# Altium PCB ArtFire.PcbDoc (part 2 of 2)
Units mil, origin at the board's own origin, x right, y up, seen from the top; angles counter-clockwise.
Board outline 4250 x 3350 mil, 2 copper layers (Top Layer, Bottom Layer); 232 components, 155 nets, 793 pads, 301 vias.
Unrouted connection lines stored in the file: 12.
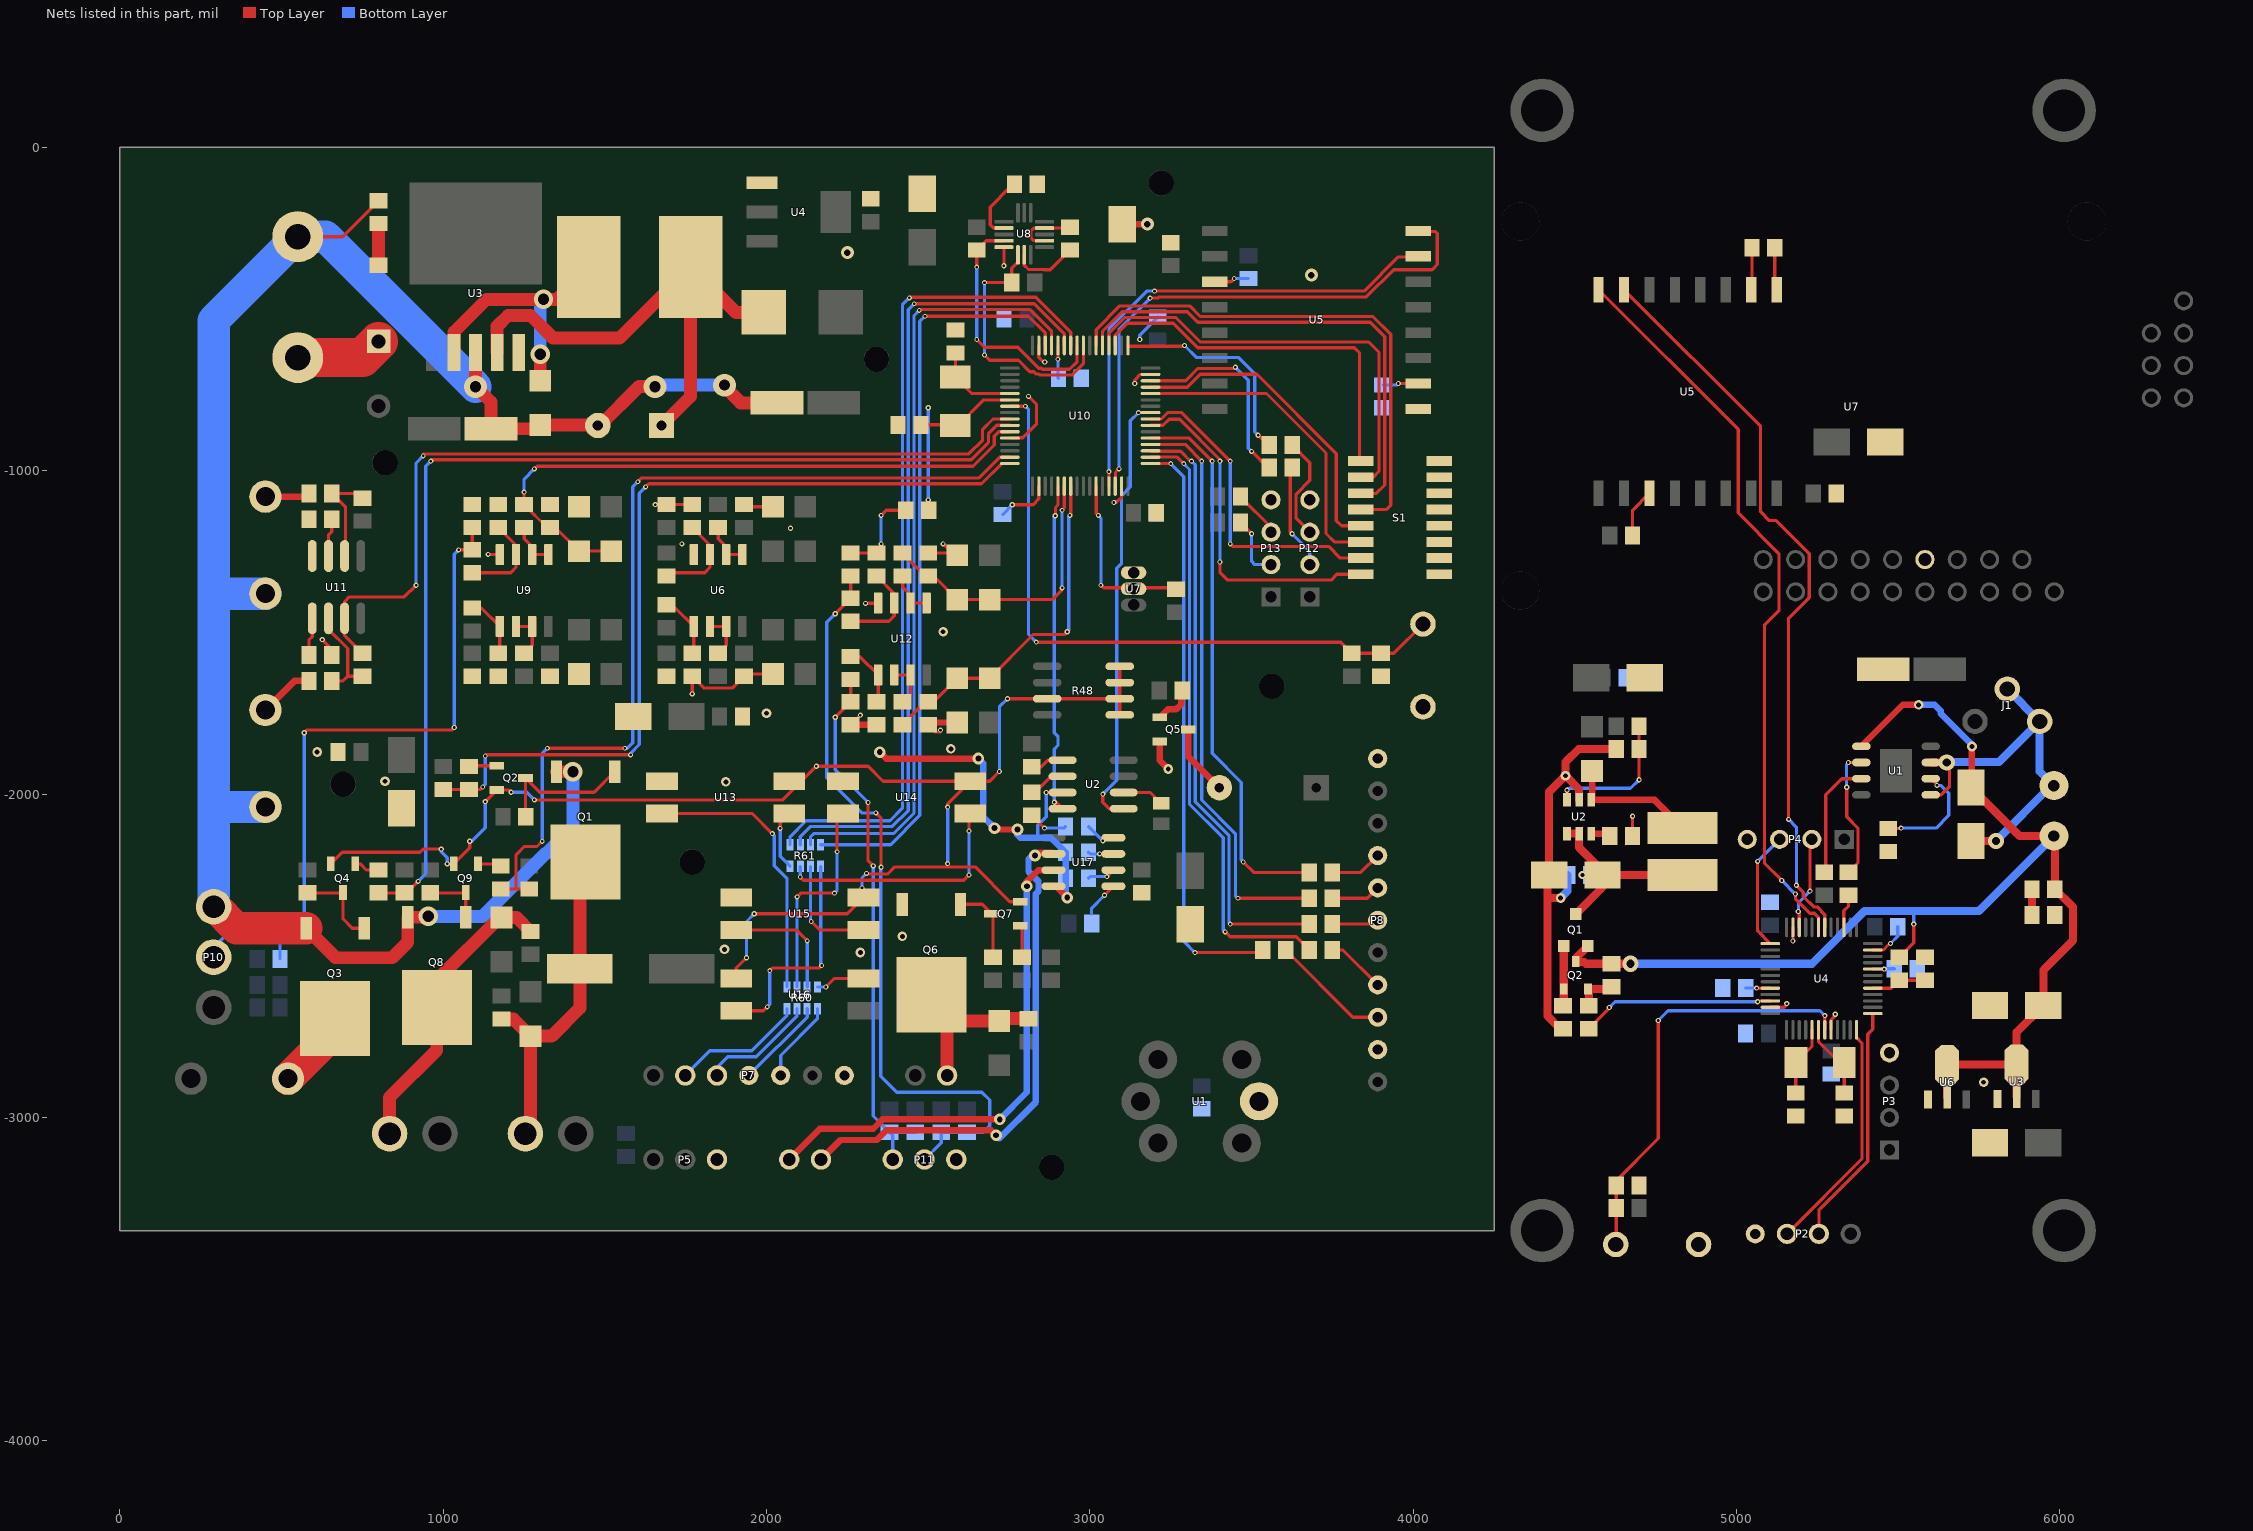
[diagram p2: the nets of this part, all layers, seen from the top]

## Via types
v1: diameter 16, hole 8, Top Layer to Bottom Layer, tented both sides, 170 vias
v2: diameter 15, hole 8, Top Layer to Bottom Layer, tented both sides, 76 vias
v3: diameter 30, hole 15, Top Layer to Bottom Layer, tented both sides, 17 vias
v4: diameter 36, hole 18, Top Layer to Bottom Layer, tented both sides, 10 vias
v5: diameter 60, hole 35, Top Layer to Bottom Layer, tented both sides, 7 vias
v6: diameter 40, hole 20, Top Layer to Bottom Layer, tented both sides, 6 vias
v7: diameter 19.68, hole 7.87, Top Layer to Bottom Layer, tented both sides, 6 vias
v8: diameter 50, hole 25, Top Layer to Bottom Layer, tented both sides, 5 vias
v9: diameter 70, hole 35, Top Layer to Bottom Layer, tented both sides, 3 vias
v10: diameter 24, hole 12, Top Layer to Bottom Layer, tented both sides, 1 vias

## Nets (pads, with @x,y where several pads share a name; then routed paths per layer and width w, separated by ;. In a path a pad name is that pad's centre, name@x,y a point inside that pad or via, vN(x,y) a via of type N, cw(c..) or ccw(c..) an arc to the next point about the centre after c; other vN are vias at no path point) (continued)
FIRE_TEM_T: R51.2 U10.9 U11.7 | length 2718.5
  Top Layer w10: R51.2@750,-1564.57 695,-1509.57 U11.7@695,-1456.46 695,-1405 710,-1390 880,-1390 v1(916,-1354) ; v2(938,-954) 938,-948 2625.46,-948 2668,-905.46 2668,-872 2700.16,-839.84 U10.9@2752.48,-839.84
  Bottom Layer w10: v1(916,-1354) 916,-976 v2(938,-954)
FIRE_UP: R11.1@880,-2305.43 R12.1@800,-2305.43 U10.10 | length 3305.4
  Top Layer w10: R12.1@800,-2305.43 R11.1@880,-2305.43 886.9,-2305.43 v2(922.33,-2270) ; v2(962,-970) 966,-966 2632.91,-966 2686,-912.91 2686,-886 2712.47,-859.53 U10.10@2752.48,-859.53
  Bottom Layer w10: v2(922.33,-2270) 946,-2246.33 946,-986 v2(962,-970)
FLD_IN: C23.2 D8.1 D10.2 R31.1 U10.11 | length 1987.2
  Top Layer w10: v2(1250,-1066) R31.1@1250,-1104.57 1320.87,-1175.43 C23.2@1330,-1175.43 1346.93,-1175.43 D10.2@1420,-1248.5 D8.1@1520,-1248.5 ; v2(1282,-994) 1290,-986 2638.37,-986 2704,-920.37 2704,-893.46 2718.24,-879.21 U10.11@2752.48,-879.21
  Bottom Layer w10: v2(1250,-1066) 1250,-1026 v2(1282,-994)
FLD_OUT: C18.1 C21.2 P10.2 R33.2 R34.1 | length 2221.5
  Top Layer w10: v1(570,-1810) 578,-1802 1026,-1802 v1(1034,-1794) ; v1(1047.43,-1244.57) R33.2@1090,-1244.57 C21.2@1090,-1175.43
  Bottom Layer w10: P10.2@290,-2504.09 290,-2474 394,-2370 466,-2370 495.43,-2399.43 C18.1@495.43,-2430 ; R34.1@495.43,-2510 C18.1@495.43,-2430 ; v1(570,-1810) 570,-2410 550,-2430 C18.1@495.43,-2430 ; v1(1034,-1794) 1034,-1258 v1(1047.43,-1244.57)
FP6291EN: R16.1@4542.83,-2725.43 U4.46 | length 598.5
  Top Layer w10: R16.1@4542.83,-2725.43 4605.83,-2662.43 v1(4605.83,-2660) ; v1(5064.83,-2642) 5067.34,-2639.5 U4.46@5104.28,-2639.5
  Bottom Layer w10: v1(4605.83,-2660) 4623.83,-2642 v1(5064.83,-2642)
GND: BT1.2 C1.2@5453.24,-1614 C2.2@5724.83,-2144.68 C3.2@4477.4,-2250 C4.2@4420.16,-2250 C5.2@4658.27,-1640 C6.2@4715.51,-1640 C7.2@5783.35,-2653.62 C8.2@5783.35,-3078.62 C9.2@5308.27,-1070 C10.2@5459.51,-911 C11.2@5027.4,-2740 C12.2@5498.27,-2410 C13.2@5292.83,-2865.43 C14.2@5102.84,-2334.57 C15.2@5182.84,-2995.43 C16.1@4698.27,-3210 C17.2@5332.84,-2995.43 D1.2@5984.27,-2374 J1.2 J1.3 P2.4 P3.4 P4.4 R4.2@5468.84,-2177.43 R6.2@4678.27,-2130 R8.2@4627.4,-1860 R10.2@5558.27,-2540 R11.2@5582.83,-2504.57 R14.2@4957.4,-2600 R15.2@5118.27,-310 R17.2@4462.84,-2725.43 S1.1@4882.2,-3392.8 U1.1@5600.31,-2002.2 U1.3@5600.31,-1902.2 U2.2@4512.83,-2017.84 U3.1@5806.97,-2942.99 U4.8 U4.23 U4.35 U4.47 U5.9@5124.02,-440.08 U6.1@5591.97,-2944.43 U7.2@5582.43,-1274.51 | length 2946.6
  Top Layer w10: R6.2@4678.27,-2130 v1(4678.27,-2068.57) ; U4.47@5104.28,-2659.18 5146.65,-2659.18 5154.83,-2651 v1(5154.83,-2648) ; U5.9@5118.27,-434.33 R15.2@5118.27,-310 ; v1(5174.17,-2454.33) U4.35@5174.17,-2412.13 ; U4.8@5292.28,-2729.06 5292.28,-2697.81 5304.83,-2685.25 v1(5304.83,-2681) ; U4.23@5421.21,-2482.02 5452.82,-2482.02 5472.83,-2462 v1(5475.83,-2462) ; U1.1@5600.31,-2002.2 5632.64,-2002.2 5658.75,-1976.08 v8@5658.75,-1900.31
  Top Layer w25: 4417.78,-2321 v3(4455.83,-2321) ; R17.2@4462.84,-2725.43 4453.53,-2725.43 4414.78,-2686.68 4414.78,-2255.38 C4.2@4420.16,-2250 4420.16,-1993.68 4467.83,-1946 4473.83,-1946 4512.83,-1985 U2.2@4512.83,-2017.84 ; v3(4470.83,-1943) 4470.83,-1901 4511.83,-1860 R8.2@4627.4,-1860 ; U1.3@5600.31,-1902.2 5656.87,-1902.2 v8@5658.75,-1900.31 ; C2.2@5724.83,-2144.68 v8(5802.16,-2144.68)
  Bottom Layer w10: v1(5475.83,-2462) 5498.27,-2439.57 C12.2@5498.27,-2410
  Bottom Layer w25: v3(4455.83,-2321) 4477.4,-2299.43 C3.2@4477.4,-2250 ; v8(5649.83,-1902.2) 5651.03,-1901 5811.44,-1901 J1.2@5937.24,-1775.2 ; v8(5802.16,-2144.68) 5973.21,-1973.62 BT1.2@5981.46,-1973.62 5937.24,-1929.4 J1.2@5937.24,-1775.2 ; J1.3@5837.24,-1675.2 J1.2@5937.24,-1775.2
  other v3: 5763.83,-2891
HIMRXD: P2.3 U4.12 | length 733.9
  Top Layer w10: P2.3@5155.98,-3360 5387.83,-3128.15 5387.83,-2770 5371.02,-2753.18 U4.12@5371.02,-2729.06
HIMTXD: P2.2@5254.41,-3360 U4.13 | length 750.2
  Top Layer w10: P2.2@5254.41,-3360 5254.41,-3287.03 5405.83,-3135.61 5405.83,-2742 5421.21,-2726.62 U4.13@5421.21,-2678.87
IO1: R61.1 U10.58 | length 2582.1
  Top Layer w10: v2(2441.5,-465.5) 2444,-463 2832.46,-463 2940.47,-571.02 U10.58@2940.47,-612.48
  Bottom Layer w10: R61.1@2072.76,-2156.54 2072.76,-2131.24 2122,-2082 2381.63,-2082 2420,-2043.63 2420,-487 v2(2441.5,-465.5)
IO2: R61.2 U10.59 | length 2505.8
  Top Layer w10: v2(2456.5,-483.5) 2827.5,-483.5 2920.79,-576.79 U10.59@2920.79,-612.48
  Bottom Layer w10: R61.2@2104.25,-2156.54 2104.25,-2131.75 2136,-2100 2389.09,-2100 2438,-2051.09 2438,-502 v2(2456.5,-483.5)
IO3: R61.3 U10.61 | length 2418.7
  Top Layer w10: v2(2472,-504) 2474.5,-501.5 2814.96,-501.5 2881.42,-567.96 U10.61@2881.42,-612.48
  Bottom Layer w10: R61.3@2135.75,-2156.54 2135.75,-2132.25 2146,-2122 2392.54,-2122 2456,-2058.54 2456,-520 v2(2472,-504)
IO4: R61.4 U10.62 | length 2326.8
  Top Layer w10: v2(2490,-522) 2810,-522 2861.73,-573.73 U10.62@2861.73,-612.48
  Bottom Layer w10: R61.4@2167.24,-2156.54 2383.46,-2156.54 2474,-2066 2474,-538 v2(2490,-522)
LDHD_IN: C42.2 D16.1 D17.2 R58.1 U10.23 | length 1083.9
  Top Layer w10: R58.1@2420,-1785.43 2490.87,-1714.57 C42.2@2500,-1714.57 2516.93,-1714.57 D17.2@2590,-1641.5 D16.1@2690,-1641.5 2825.5,-1506 2922,-1506 v1(2930,-1498) ; v2(2938,-1138) 2940.47,-1135.53 U10.23@2940.47,-1047.52
  Bottom Layer w10: v1(2930,-1498) 2934.5,-1493.5 2934.5,-1141.5 v2(2938,-1138)
LDHD_OUT: C28.1 C40.2 P11.1 R39.1 R59.2 | length 1657.7
  Top Layer w10: v1(2212.57,-1762) C40.2@2260,-1714.57 R59.2@2260,-1645.43 ; v1(2314,-2026) 2314,-2206 v1(2330,-2222)
  Bottom Layer w10: v1(2212.57,-1762) 2212.57,-1924.57 v1(2314,-2026) ; v1(2330,-2222) 2330,-2995.43 C28.1@2380,-3045.43 ; P11.1@2390,-3130 2390,-3055.43 C28.1@2380,-3045.43 ; R39.1@2460,-3045.43 C28.1@2380,-3045.43
LDLD_IN: C36.2 D14.1 D15.2 R49.1 U10.22 | length 889.3
  Top Layer w10: R49.1@2420,-1254.57 2490.87,-1325.43 C36.2@2500,-1325.43 2516.93,-1325.43 D15.2@2590,-1398.5 D14.1@2690,-1398.5 2883.07,-1398.5 2914,-1367.57 v2(2914,-1362) ; v2(2914,-1122) 2920.79,-1115.21 U10.22@2920.79,-1047.52
  Bottom Layer w10: v2(2914,-1362) v2(2914,-1122)
LDLD_OUT: C27.1 C34.2 P11.2 R38.1 R50.2 | length 2385
  Top Layer w10: v1(2212.57,-1442) R50.2@2260,-1394.57 C34.2@2260,-1325.43 ; v1(2338,-2058) 2354,-2074 v1(2354,-2226)
  Bottom Layer w10: v1(2212.57,-1442) 2186,-1468.57 2186,-1949.7 2294.3,-2058 v1(2338,-2058) ; v1(2354,-2226) 2353,-2227 2353,-2873 2402,-2922 2666,-2922 2690,-2946 2690,-3026 2670.57,-3045.43 R38.1@2620,-3045.43 C27.1@2540,-3045.43 2540,-3078.43 P11.2@2488.43,-3130
M6_CLK: U2.5@3104.49,-2045 U10.41 | length 1360.6
  Top Layer w10: v1(3040,-2000) 3040,-2025 3060,-2045 U2.5@3104.49,-2045 ; v1(3150.16,-820.16) U10.41@3187.52,-820.16
  Bottom Layer w10: v1(3040,-2000) 3082.63,-1957.37 3082.63,-1301.46 3097.94,-1286.15 3097.94,-1077.06 3125,-1050 3125,-845.31 v1(3150.16,-820.16)
M6_DATA: U2.4@2915.51,-2045 U10.21 | length 1025
  Top Layer w10: v1(2890,-2025) 2895.51,-2025 U2.4@2915.51,-2045 ; v1(2893,-1138.9) 2893.5,-1138.4 2893.5,-1113.51 2901.1,-1105.91 U10.21@2901.1,-1047.52
  Bottom Layer w10: v1(2890,-2025) 2890,-1860.7 2901,-1849.7 2901,-1821.3 2890,-1810.3 2890,-1141.9 v1(2893,-1138.9)
MMA_SCL: R29.1 U8.4 U10.57 | length 780.6
  Top Layer w10: v2(2650,-594) 2674,-618 2776.95,-618 2841.95,-683 2850.15,-683 2853.15,-686 2936.8,-686 2960.16,-662.64 U10.57@2960.16,-612.48 ; v2(2650,-370) R29.1@2650,-317.43 2678.69,-288.74 U8.4@2734.06,-288.74
  Bottom Layer w10: v2(2650,-594) v2(2650,-370)
MMA_SDA: R30.1 U8.6 U10.56 | length 804.5
  Top Layer w10: v2(2674,-642) 2690,-658 2779.05,-658 2814.45,-693.4 2826.89,-693.4 2834.49,-701 2842.7,-701 2845.7,-704 2944.25,-704 2979.84,-668.41 U10.56@2979.84,-612.48 ; v2(2674,-418) R30.1@2758.57,-418 2758.57,-373.43 2777.37,-354.63 U8.6@2777.37,-332.05
  Bottom Layer w10: v2(2674,-642) v2(2674,-418)
NetC1_2: C1.2@2820,-1915.43 U2.1@2915.51,-1895 | length 104
  Top Layer w10: C1.2@2820,-1915.43 2849.57,-1915.43 2870,-1895 U2.1@2915.51,-1895
NetC2_1: C2.1@2820,-2065.43 R46.1 | length 123
  Top Layer w10: C2.1@2820,-2065.43 v1(2859.57,-2105)
  Bottom Layer w10: v1(2859.57,-2105) 2919.57,-2105 R46.1@2924.57,-2100
NetC2_2: C2.2@2820,-1994.57 U2.2@2915.51,-1945 | length 116
  Top Layer w10: C2.2@2820,-1994.57 2830.43,-1994.57 2880,-1945 U2.2@2915.51,-1945
NetC3_1: C3.1@4548.27,-2250 C4.1@4585.51,-2250 L1.1@4832.83,-2250 Q1.3@4502.83,-2370.79 U2.4@4475.43,-2122.17 U2.5@4512.83,-2122.17 | length 672.1
  Top Layer w25: U2.4@4475.43,-2122.17 U2.5@4512.83,-2122.17 4512.83,-2165 C4.1@4585.51,-2237.68 ; Q1.3@4502.83,-2370.79 4585.51,-2288.11 C4.1@4585.51,-2250 ; v10(4523.52,-2250) C4.1@4585.51,-2250 ; L1.1@4832.83,-2250 C4.1@4585.51,-2250
  Bottom Layer w25: v10(4523.52,-2250) C3.1@4548.27,-2250
NetC4_2: C4.2@1422.52,-2540 C5.2@1180,-2695.43 D1.1@1270,-2748.5 P2.2@1254.09,-3050 Q1.2@1440,-2210.39 | length 1067
  Top Layer w40: C5.2@1180,-2695.43 1216.93,-2695.43 D1.1@1270,-2748.5 ; P2.2@1254.09,-3050 1270,-3034.09 D1.1@1270,-2748.5 ; Q1.2@1440,-2210.39 1422.52,-2227.87 C4.2@1422.52,-2540 1422.52,-2661.48 1335.5,-2748.5 D1.1@1270,-2748.5
NetC8_1: C8.1@1675,-860 L1.2@1764.96,-370 L3.1 U3.4 | length 1624.2
  Top Layer w40: U3.4@1166.93,-634.25 1166.93,-553.07 1200,-520 1270,-520 1340,-590 1544.96,-590 L1.2@1764.96,-370 ; C8.1@1675,-860 1764.96,-770.04 L1.2@1764.96,-370 ; L3.1@1990.91,-510 1904.96,-510 L1.2@1764.96,-370
NetC9_2: C9.2@2810,-2694.57 D3.1 P6.2 Q6.2 | length 469.2
  Top Layer w40: P6.2@2558.43,-2870 2558.43,-2668.82 2591.1,-2701.5 D3.1@2720,-2701.5 2726.93,-2694.57 C9.2@2810,-2694.57
NetC12_2: C12.2@1270,-2424.57 D5.1 P9.2 Q8.2 | length 922.8
  Top Layer w40: P9.2@834.09,-3050 834.09,-2937.91 980,-2792 Q8.2@980,-2660.39 980,-2576 1174.5,-2381.5 D5.1@1180,-2381.5 1226.93,-2381.5 C12.2@1270,-2424.57
NetC15_1: C15.1@5182.84,-2924.57 U4.5 Y1.2@5183.23,-2830 | length 215.8
  Top Layer w10: C15.1@5183.23,-2924.17 Y1.2@5183.23,-2830 5233.22,-2780.01 U4.5@5233.22,-2729.06
NetC16_2: C16.2 R13.2@4627.4,-3280 R27.1 S1.2@4626.29,-3392.8 U4.7 U6.3@1825,-1258.78 | length 1613.2
  Top Layer w10: R27.1@1690,-1315.43 1808.57,-1315.43 1825,-1299 U6.3@1825,-1258.78 1825,-1230.43 C16.2@1770,-1175.43 ; S1.2@4626.29,-3392.8 4627.4,-3391.69 R13.2@4627.4,-3280 C16.2@4627.4,-3210 4627.4,-3195.43 4757.83,-3065 v1(4757.83,-2700) ; U4.7@5272.59,-2729.06 5272.59,-2685.24 v1(5272.83,-2685)
  Bottom Layer w10: v1(4757.83,-2700) 4787.83,-2670 5257.83,-2670 v1(5272.83,-2685)
NetC17_1: C17.1@5332.84,-2924.57 U4.6 Y1.1@5332.83,-2830 | length 237.4
  Top Layer w10: U4.6@5252.91,-2729.06 5252.91,-2765.07 5317.83,-2830 Y1.1@5332.83,-2830 C17.1@5332.84,-2924.57
NetC20_2: C20.2 U8.2 | length 202.9
  Top Layer w10: U8.2@2734.06,-249.37 2734.06,-248.59 2700.88,-248.59 2691.54,-239.25 2691.54,-184.46 2754,-122 C20.2@2766.57,-122
NetC22_2: C22.2 R33.1 U9.3 | length 288.2
  Top Layer w10: R33.1@1090,-1315.43 1208.57,-1315.43 1225,-1299 U9.3@1225,-1258.78 1225,-1230.43 C22.2@1170,-1175.43
NetC25_2: C25.2 R36.1 U6.5 | length 186.8
  Top Layer w10: R36.1@1690,-1424.57 1718.35,-1424.57 U6.5@1775,-1481.22 C25.2@1775,-1559.57
NetC30_2: C30.2 R41.1 U9.5 | length 186.8
  Top Layer w10: R41.1@1090,-1424.57 1118.35,-1424.57 U9.5@1175,-1481.22 C30.2@1175,-1559.57
NetC32_1: C32.1 U10.5 Y1.2@2584,-710.39 | length 264.4
  Top Layer w10: C32.1@2584,-635.43 Y1.2@2584,-710.39 2634.71,-761.1 U10.5@2752.48,-761.1
NetC33_1: C33.1 U10.6 Y1.1@2584,-860 | length 305.9
  Top Layer w10: C33.1@2477.43,-858 Y1.1@2582,-858 ; Y1.1@2584,-860 2592,-860 2671.21,-780.79 U10.6@2752.48,-780.79
NetC35_2: C35.2 R50.1 U12.3 | length 288.2
  Top Layer w10: R50.1@2260,-1465.43 2378.57,-1465.43 2395,-1449 U12.3@2395,-1408.78 2395,-1380.43 C35.2@2340,-1325.43
NetC39_2: C39.2 R57.2 S2.2 U10.7 | length 2039.2
  Top Layer w10: U10.7@2752.48,-800.47 v2(2800.47,-800.47) ; v2(2834,-1530) 3775.43,-1530 R57.2@3810,-1564.57 C39.2@3900,-1564.57 3939.53,-1564.57 S2.2@4030,-1474.09
  Bottom Layer w10: v2(2800.47,-800.47) 2810,-810 2810,-1506 v2(2834,-1530)
NetC41_2: C41.2 R59.1 U12.5 | length 186.8
  Top Layer w10: R59.1@2260,-1574.57 2288.35,-1574.57 U12.5@2345,-1631.22 C41.2@2345,-1709.57
NetCB1_1: CB1.1 P1.1 | length 270.7
  Top Layer w120: P1.1@550,-650 750,-650 CB1.1@800,-600
NetD1_1: D1.1@5913.4,-2374 R1.2@5913.4,-2294 | length 80
  Top Layer w25: D1.1@5913.4,-2374 R1.2@5913.4,-2294
NetD2_1: D2.1 L1.2@4832.83,-2104.33 R4.1@800,-364.57 U2.1@4550.24,-2017.84 | length 538
  Top Layer w20: D2.1@4552.83,-1928.5 4552.83,-2015.24 U2.1@4550.24,-2017.84 4746.34,-2017.84 L1.2@4832.83,-2104.33
  Top Layer w40: R4.1@800,-364.57 D2.1@800,-235.43
NetD4_2: D4.2 L1.1@1450,-370 U3.2@1033.07,-634.25 | length 819.1
  Top Layer w40: U3.2@1033.07,-634.25 1033.07,-570.93 1134,-470 v5(1310,-470) 1350,-470 L1.1@1450,-370 ; D4.2@1300,-721.5 v5(1300,-640)
  Bottom Layer w40: v5(1300,-640) 1300,-480 v5(1310,-470)
NetL2_1: L2.1 U2.6@3104.49,-1995 | length 129.4
  Top Layer w10: U2.6@3104.49,-1995 3186.5,-1995 L2.1@3220,-2028.5
NetLS1_2: LS1.2 Q5.3 | length 219.8
  Top Layer w20: Q5.3@3304.29,-1800 3304.29,-1883.9 LS1.2@3400.39,-1980
NetP3_1: P3.1@2070,-3130 U17.7 | length 1571
  Top Layer w20: P3.1@2070,-3130 2165,-3035 2330,-3035 2360,-3005 2719.95,-3005 v4(2721,-3006.05) ; v4(2805,-2285) 2805,-2270 2840,-2235 U17.7@2887.48,-2235
  Bottom Layer w20: v4(2721,-3006.05) 2805,-2922.05 v4(2805,-2285)
NetP3_2: P3.2@2168.43,-3130 U17.6 | length 1612.3
  Top Layer w20: P3.2@2168.43,-3130 2228.74,-3069.68 2340.32,-3069.68 2370,-3040 2695,-3040 v4(2710,-3055) ; v4(2830,-2190) 2838.09,-2181.91 2884.39,-2181.91 U17.6@2887.48,-2185
  Bottom Layer w20: v4(2710,-3055) 2720,-3065 2833,-2952 2833,-2307.91 2841,-2299.91 2841,-2270.09 2810,-2239.09 2810,-2201.91 2821.91,-2190 v4(2830,-2190)
NetP4_2: P4.2@520,-2880 Q3.2 | length 246.1
  Top Layer w100: P4.2@520,-2880 666,-2734 Q3.2@666,-2694.39
NetP7_2: P7.2 R60.8 | length 412.6
  Bottom Layer w10: P7.2@1748.43,-2870 1824.43,-2794 1954,-2794 2062.76,-2685.24 R60.8@2062.76,-2663.46
NetP7_3: P7.3 R60.7 | length 360.6
  Bottom Layer w10: P7.3@1846.85,-2870 1846.85,-2845.15 1880,-2812 1968,-2812 2094.25,-2685.75 R60.7@2094.25,-2663.46
NetP7_4: P7.4 R60.6 | length 281.3
  Bottom Layer w10: P7.4@1945.28,-2870 2125.75,-2689.53 R60.6@2125.75,-2663.46
NetP7_5: P7.5 R60.5 | length 253.6
  Bottom Layer w10: P7.5@2043.7,-2870 2043.7,-2808.3 2157.24,-2694.76 R60.5@2157.24,-2663.46
NetP8_3: P8.3 R62.1 | length 370.7
  Top Layer w10: R62.1@3605.43,-2482 3813.43,-2690 P8.3@3890,-2690
NetP8_4: P8.4 R18.1 | length 185.3
  Top Layer w10: R18.1@3749.43,-2482 3782,-2482 P8.4@3890,-2590
NetP8_6: P8.6 R20.1 | length 145.5
  Top Layer w10: R20.1@3749.43,-2402 3878,-2402 P8.6@3890,-2390
NetP8_7: P8.7 R21.1 | length 153.8
  Top Layer w10: R21.1@3749.43,-2322 3858,-2322 P8.7@3890,-2290
NetP8_8: P8.8 R23.1 | length 162.1
  Top Layer w10: R23.1@3749.43,-2242 3838,-2242 P8.8@3890,-2190
NetP12_2: P12.2 R47.1 | length 327.5
  Top Layer w10: v1(3625.43,-1194.57) 3619.47,-1188.61 3619.47,-995.96 R47.1@3625.43,-990
  Bottom Layer w10: v1(3625.43,-1194.57) 3625.43,-1195.58 3680,-1250.14 P12.2@3680,-1290
NetP12_3: P12.3 R55.1 | length 327.8
  Top Layer w10: R55.1@3625.43,-920 3680,-974.57 3680,-1029.86 3637.47,-1072.38 3637.47,-1147.47 P12.3@3680,-1190
NetP13_2: P13.2 R56.1 | length 198.5
  Top Layer w10: R56.1@3465.43,-1160 v1(3500,-1194.57)
  Bottom Layer w10: v1(3500,-1194.57) 3500,-1280 3510,-1290 P13.2@3560,-1290
NetP13_3: P13.3 R63.1 | length 149.2
  Top Layer w10: R63.1@3465.43,-1080 3560,-1174.57 P13.3@3560,-1190
NetP14_1: P14.1 R44.1 | length 138.7
  Top Layer w20: P14.1@450,-1080 574.57,-1080 R44.1@584.57,-1070
NetP15_1: P15.1 R52.1 | length 171.8
  Top Layer w20: P15.1@450,-1740 540,-1650 R52.1@584.57,-1650
NetQ1_1: Q1.1 Q2.1@4465.43,-2602.32 Q2.3@1254.29,-1950 R1.2@1255.43,-2070 R17.1@4462.84,-2654.57 | length 621.5
  Top Layer w10: R1.2@1254.29,-2068.86 Q2.3@1254.29,-1950 1298.29,-1994 1466.63,-1994 Q1.1@1529.76,-1930.87
  Top Layer w25: R17.1@4465.43,-2651.97 Q2.1@4465.43,-2602.32 Q1.1@4465.43,-2469.21
NetQ2_1: Q2.1@1165.71,-1912.6 R7.2@1080,-1914.57 | length 83.7
  Top Layer w10: R7.2@1081.97,-1912.6 Q2.1@1165.71,-1912.6
NetQ2_2: Q2.2@4540.24,-2602.32 R5.1@4612.83,-2595.43 R16.2@4542.83,-2654.57 | length 128.8
  Top Layer w25: R16.2@4542.83,-2654.57 4542.83,-2604.92 Q2.2@4540.24,-2602.32 4605.94,-2602.32 R5.1@4612.83,-2595.43
NetQ3_1: Q3.1 Q4.3 R10.2@580,-2305.43 | length 269.9
  Top Layer w10: R10.2@580,-2305.43 688.86,-2305.43 Q4.3@690,-2304.29 690,-2386 718.87,-2414.87 Q3.1@755.76,-2414.87
NetQ4_1: Q4.1 R12.2@800,-2234.57 | length 80.4
  Top Layer w10: Q4.1@727.4,-2215.71 743.71,-2215.71 762.57,-2234.57 R12.2@800,-2234.57
NetQ5_1: Q5.1 R14.1@3285.43,-1680 | length 126.5
  Top Layer w20: Q5.1@3215.71,-1762.6 3240.31,-1738 3266,-1738 3282,-1722 3282,-1683.43 R14.1@3285.43,-1680
NetQ6_1: Q6.1 Q7.3 R13.2@2700,-2504.57 | length 244.4
  Top Layer w10: Q6.1@2599.76,-2340.87 2666.57,-2340.87 Q7.3@2695.71,-2370 2700,-2374.29 R13.2@2700,-2504.57
NetQ7_1: Q7.1 R16.2@2790,-2504.57 | length 91.5
  Top Layer w10: R16.2@2790,-2504.57 Q7.1@2790,-2413.11
NetQ8_1: Q8.1 Q9.3 R17.2@960,-2305.43 | length 187.1
  Top Layer w10: R17.2@960,-2305.43 1068.86,-2305.43 Q9.3@1070,-2304.29 1070,-2380.63 Q8.1@1069.76,-2380.87
NetQ9_1: Q9.1 R22.2 | length 73.4
  Top Layer w10: Q9.1@1107.4,-2215.71 1171.14,-2215.71 R22.2@1178,-2222.57
NetR2_1: R2.1@5346.1,-2241.46 U1.6@5385.74,-1902.2 | length 408.6
  Top Layer w10: v1(5340.83,-1979) 5340.83,-2070.56 5375.36,-2105.09 5375.36,-2212.2 R2.1@5346.1,-2241.46 ; v1(5345.64,-1902.2) U1.6@5385.74,-1902.2
  Bottom Layer w10: v1(5340.83,-1979) 5339.83,-1978 5339.83,-1908 v1(5345.64,-1902.2)
NetR2_2: R2.2@3005.43,-2400 U17.1 | length 113
  Top Layer w10: v1(3045,-2312.52) U17.1@3072.52,-2285
  Bottom Layer w10: 3005,-2370 3005,-2352.52 v1(3045,-2312.52)
NetR3_1: R3.1@5271.1,-2241.46 U1.7 | length 372
  Top Layer w10: R3.1@5271.1,-2241.46 5275.36,-2237.2 5275.36,-2002.47 5325.64,-1952.2 U1.7@5385.74,-1952.2
NetR4_1: R4.1@5468.84,-2106.57 U1.2@5600.31,-1952.2 | length 347.6
  Top Layer w10: R4.1@5468.84,-2106.57 5507.27,-2106.57 v1(5508.83,-2105) ; U1.2@5600.31,-1952.2 5619.83,-1971.72 v1(5619.83,-1973)
  Bottom Layer w10: v1(5508.83,-2105) 5616.83,-2105 5655.83,-2066 5655.83,-1997 5631.83,-1973 v1(5619.83,-1973)
NetR6_1: R6.1@4607.4,-2130 U2.6@4550.24,-2122.17 | length 60.4
  Top Layer w20: U2.6@4550.24,-2122.17 4599.57,-2122.17 R6.1@4607.4,-2130
NetR7_2: R7.2@4698.27,-1790 R8.1@4698.27,-1860 U2.3@4475.43,-2017.84 | length 431.7
  Top Layer w10: U2.3@4475.43,-2017.84 v1(4475.43,-1988) ; v1(4698.27,-1955.57) R8.1@4698.27,-1860 R7.2@4698.27,-1790
  Bottom Layer w10: v1(4475.43,-1988) 4481.43,-1982 4671.83,-1982 v1(4698.27,-1955.57)
NetR8_2: R8.2@2995.43,-2260 U17.2 | length 87.4
  Top Layer w10: v1(3052.52,-2255) U17.2@3072.52,-2235
  Bottom Layer w10: R8.2@2995.43,-2260 3000.43,-2255 v1(3052.52,-2255)
NetR9_2: R9.2 R11.1@5582.83,-2575.43 U4.17 U17.3 | length 251
  Top Layer w10: v1(3030,-2185) U17.3@3072.52,-2185 ; U4.17@5421.21,-2600.13 5478.14,-2600.13 R9.2@5502.84,-2575.43 R11.1@5582.83,-2575.43
  Bottom Layer w10: R9.2@2995.43,-2180 3000.43,-2185 v1(3030,-2185)
NetR10_1: R10.1@5487.4,-2540 U4.20 | length 66.6
  Top Layer w10: U4.20@5421.21,-2541.07 v1(5456.76,-2541.07)
  Bottom Layer w10: v1(5456.76,-2541.07) 5457.83,-2540 R10.1@5487.4,-2540
NetR12_1: R12.1@4678.27,-1200 U5.3@4730.32,-1070 | length 151.6
  Top Layer w10: R12.1@4678.27,-1200 4678.27,-1122.05 U5.3@4730.32,-1070
NetR14_1: R14.1@5028.27,-2600 U4.44 | length 76.1
  Top Layer w10: v1(5061.83,-2600) 5061.96,-2600.13 U4.44@5104.28,-2600.13
  Bottom Layer w10: R14.1@5028.27,-2600 v1(5061.83,-2600)
NetR15_1: R15.1@5047.4,-310 U5.10@5045.28,-440.08 | length 131
  Top Layer w10: U5.10@5045.28,-440.08 5047.4,-437.95 R15.1@5047.4,-310
NetR24_1: R24.1 U5.3@3386,-415.48 | length 108.2
  Top Layer w10: U5.3@3386,-415.48 3436.52,-415.48 v2(3446.57,-405.43)
  Bottom Layer w10: v2(3446.57,-405.43) R24.1@3490,-405.43
NetR26_2: R26.2 U6.1@1925,-1258.78 U6.2@1875,-1258.78 | length 149.5
  Top Layer w10: R26.2@1850,-1175.43 1850.8,-1176.23 1850.8,-1210.8 1875,-1235 U6.2@1875,-1258.78 U6.1@1925,-1258.78 U6.1@1930.78,-1258.78
NetR28_1: R28.1 U5.10@4015.92,-730.44 | length 112
  Top Layer w10: v2(3954,-730) 4015.48,-730 U5.10@4015.92,-730.44
  Bottom Layer w10: R28.1@3906,-734.57 3949.43,-734.57 v2(3954,-730)
NetR31_2: R31.2 U9.1 U9.2 | length 149.5
  Top Layer w10: R31.2@1250,-1175.43 1250.8,-1176.23 1250.8,-1210.8 1275,-1235 U9.2@1275,-1258.78 U9.1@1325,-1258.78 U9.1@1330.78,-1258.78
NetR32_2: R32.2 U6.6 U6.7 | length 143.7
  Top Layer w10: U6.6@1825,-1481.22 U6.7@1875,-1481.22 1875,-1539.57 R32.2@1850,-1564.57
NetR37_2: R37.2 U8.7 | length 204.1
  Top Layer w10: U8.7@2797.06,-332.05 2797.06,-364.5 2810,-377.44 2858.44,-377.44 2859,-378 2877.43,-378 R37.2@2938,-317.43
NetR40_2: R40.2 U9.6 U9.7 | length 143.7
  Top Layer w10: U9.6@1225,-1481.22 U9.7@1275,-1481.22 1275,-1539.57 R40.2@1250,-1564.57
NetR42_1: R42.1 R44.2 U11.2 | length 308.8
  Top Layer w10: U11.2@698,-1260.54 698,-1112.57 R44.2@655.43,-1070 735.43,-1070 R42.1@750,-1084.57
NetR45_2: R45.2 U11.3 | length 117.9
  Top Layer w10: U11.3@645,-1263.54 645,-1199 655.43,-1188.57 R45.2@655.43,-1150
NetR46_2: R46.2 U17.4 | length 99.5
  Top Layer w10: v1(3040,-2144.57) 3049.57,-2135 U17.4@3072.52,-2135
  Bottom Layer w10: R46.2@2995.43,-2100 v1(3040,-2144.57)
NetR49_2: R49.2 U12.1 U12.2 | length 149.5
  Top Layer w10: R49.2@2420,-1325.43 2420.8,-1326.23 2420.8,-1360.8 2445,-1385 U12.2@2445,-1408.78 U12.1@2495,-1408.78 U12.1@2500.78,-1408.78
NetR51_1: R51.1 R52.2 U11.6 | length 304.3
  Top Layer w10: U11.6@645,-1456.46 645,-1490 704.57,-1549.57 704.57,-1635.43 ; R52.2@655.43,-1650 690,-1650 704.57,-1635.43 ; R51.1@750,-1635.43 704.57,-1635.43
NetR53_2: R53.2 U11.5 | length 117.9
  Top Layer w10: R53.2@584.57,-1570 584.57,-1523.43 595,-1513 U11.5@595,-1456.46
NetR54_2: R54.2 U10.60 | length 102.1
  Top Layer w10: v2(2901.1,-654.9) U10.60@2901.1,-612.48
  Bottom Layer w10: v2(2901.1,-654.9) 2901.1,-712.54 R54.2@2902.57,-714
NetR58_2: R58.2 U12.6 U12.7 | length 143.7
  Top Layer w10: U12.6@2395,-1631.22 U12.7@2445,-1631.22 2445,-1689.57 R58.2@2420,-1714.57
NetR60_1: R60.1 U13.4 | length 860.5
  Top Layer w10: U13.4@1676.3,-2060 1956,-2060 v2(2018,-2122)
  Bottom Layer w10: v2(2018,-2122) 2024,-2128 2024,-2221.64 2062.76,-2260.39 R60.1@2062.76,-2596.54
NetR60_2: R60.2 U14.4 | length 656.3
  Top Layer w10: v2(2094.25,-2317.75) 2106,-2306 v2(2210,-2306) ; v2(2218,-2178) 2218,-2078.3 U14.4@2236.3,-2060
  Bottom Layer w10: R60.2@2094.25,-2596.54 v2(2094.25,-2317.75) ; v2(2210,-2306) 2218,-2298 v2(2218,-2178)
NetR60_3: R60.3 U15.4 | length 376.2
  Top Layer w10: U15.4@1906.3,-2420 2092,-2420 v2(2125.75,-2453.75)
  Bottom Layer w10: R60.3@2125.75,-2596.54 v2(2125.75,-2453.75)
NetR60_4: R60.4 U16.2 | length 153.7
  Top Layer w10: v2(2183.46,-2596.54) 2210,-2570 U16.2@2300,-2570
  Bottom Layer w10: R60.4@2157.24,-2596.54 v2(2183.46,-2596.54)
NetR61_5: R61.5 U16.4 | length 690.3
  Top Layer w10: U16.4@1906.3,-2670 1990,-2670 v2(2002,-2658) ; v2(2010,-2546) 2018,-2538 2162,-2538 v2(2170,-2530)
  Bottom Layer w10: v2(2002,-2658) 2010,-2650 v2(2010,-2546) ; R61.5@2167.24,-2223.46 2167.24,-2527.24 v2(2170,-2530)
NetR61_6: R61.6 U15.1 | length 344.2
  Top Layer w10: v2(2138,-2394) 2164,-2420 U15.1@2300,-2420
  Bottom Layer w10: R61.6@2135.75,-2223.46 2135.75,-2391.75 v2(2138,-2394)
NetR61_7: R61.7 U14.1 | length 756.9
  Top Layer w10: v2(2104.25,-2256.25) 2114,-2266 2610,-2266 v2(2626,-2250) ; v2(2626,-2114) 2626,-2064 U14.1@2630,-2060
  Bottom Layer w10: v2(2104.25,-2256.25) R61.7@2104.25,-2223.46 ; v2(2626,-2250) v2(2626,-2114)
NetR61_8: R61.8 U13.1 | length 187.8
  Top Layer w10: v2(2042,-2106) 2042,-2088 U13.1@2070,-2060
  Bottom Layer w10: v2(2042,-2106) 2042,-2192.71 R61.8@2072.76,-2223.46
PGND: C3.1@3160,-2305.43 C6.2@3310,-2402.68 C7.2@1147.6,-870 C8.2@1478.15,-860 C15.1@1690,-1104.57 C16.1@1770,-1104.57 C17.1@1930,-1104.57 C21.1 C22.1 C23.1 C24.1 C25.1 C26.1 C29.1 C30.1 C31.1 C34.1 C35.1 C36.1 C40.1 C41.1 C42.1 C45.2 C46.2 C47.2 C49.2 C50.2 D2.2@800,-164.57 D4.1 D7.1 D10.1 D11.1 D13.1 D15.1 D17.1 P1.2 P5.3 P7.7 P8.2 P8.11 P10.3 P11.3 P14.2 P15.2 Q1.3@1350.24,-1930.87 Q3.3 Q5.2 Q6.3 Q8.3 R3.1@2430.57,-1122 R5.2@3346,-2973.43 R8.1@2924.57,-2260 R9.1@2924.57,-2180 R45.1 R53.1 U1.5@3523.07,-2950 U2.3@2915.51,-1995 U3.3@1100,-634.25 U3.5 U6.4 U9.4 U11.4 U12.4 U13.3 U14.3 U15.3 U17.8 | length 8994.3
  Top Layer w10: P1.2@550,-275.98 688.58,-275.98 D2.2@800,-164.57 ; v1(626,-1522) 655.43,-1551.43 R53.1@655.43,-1570 ; v1(1138.78,-1258.78) U9.4@1175,-1258.78 ; v1(1655.43,-1104.57) C15.1@1690,-1104.57 C16.1@1770,-1104.57 ; v1(1770,-1690) C25.1@1770,-1635.43 1806.62,-1672.06 1893.38,-1672.06 C26.1@1930,-1635.43 1936.93,-1628.5 D11.1@2020,-1628.5 ; C17.1@1936.93,-1111.5 D7.1@2020,-1111.5 ; C40.1@2260,-1785.43 v1(2290,-1755.43) ; C34.1@2260,-1254.57 C35.1@2340,-1254.57 ; v1(2306,-1410) U12.4@2343.78,-1410 ; v1(2354,-1138) 2370,-1122 R3.1@2430.57,-1122 ; C42.1@2500,-1785.43 2522.57,-1808 2535.68,-1808 2538,-1805.68 v1(2538,-1802) ; C36.1@2500,-1254.57 D15.1@2574.57,-1254.57 ; v1(2546,-1226) D15.1@2574.57,-1254.57 ; D15.1@2590,-1261.5 2581.5,-1261.5 D15.1@2574.57,-1254.57 ; v1(2865,-1995) U2.3@2915.51,-1995
  Top Layer w20: C40.1@2260,-1785.43 C41.1@2340,-1785.43 ; v4(2350,-1870) 2370,-1890 v4(2655,-1890) ; C42.1@2506.93,-1778.5 D17.1@2590,-1778.5 ; v4(2705,-2105) 2709.38,-2109.38 v4(2776,-2109.38) ; U17.8@2887.48,-2285 2895,-2285 v4(2930,-2320) ; Q5.2@3215.71,-1837.4 3215.71,-1895.71 v3(3242,-1922)
  Top Layer w40: Q3.3@576.24,-2414.87 667.37,-2506 842,-2506 890.24,-2457.76 Q8.3@890.24,-2380.87 951.13,-2380.87 v5(954,-2378) ; U3.3@1100,-634.25 v9(1100,-740) 1147.6,-787.6 C7.2@1147.6,-870 1288.5,-870 D4.1@1300,-858.5 1486.5,-858.5 1605,-740 v9(1655,-740) ; Q1.3@1350.24,-1930.87 v5(1401.13,-1930.87) ; v9(1870,-735) 1865,-735 1920,-790 C47.2@2032.4,-790
  Top Layer w100: P10.3@290,-2348.19 293.9,-2348.19 360.58,-2414.87 Q3.3@576.24,-2414.87
  Bottom Layer w10: v1(2354,-1226) v1(2354,-1138) ; 2840,-2135 2840,-2126.5 2838.57,-2125.07 2838.57,-2096.3 2865,-2069.87 v1(2865,-1995)
  Bottom Layer w20: v4(2655,-1890) 2670,-1905 2670,-2070 v4(2705,-2105) ; v4(2776,-2109.38) 2775,-2110.38 2775,-2125 2785,-2135 2840,-2135 2879.57,-2135 R9.1@2924.57,-2180 R8.1@2924.57,-2260 2924.57,-2314.57 v4(2930,-2320)
  Bottom Layer w40: v5(954,-2378) 1122,-2378 1318.5,-2181.5 1320.7,-2181.5 1401.13,-2101.07 v5(1401.13,-1930.87) ; v9(1655,-740) 1660,-735 v9(1870,-735)
  Bottom Layer w100: P10.3@290,-2348.19 290,-1370 ; 296,-2040 P15.2@450,-2040 ; P14.2@450,-1380 300,-1380 290,-1370 ; v9(1100,-740) 635.98,-275.98 P1.2@550,-275.98 290,-535.98 290,-1370
  other v1: 1738,-1226 2074,-1178
  other v3: 2290,-2490 1870,-2480 2420,-2440 1874,-1962 820,-1960 610,-1870 2570,-1860 2000,-1750 2546,-1498
PUMP1: R19.1 R22.1 U10.15 | length 2854.4
  Top Layer w10: R22.1@1178,-2293.43 1222.57,-2293.43 ; R19.1@1266,-2293.43 1222.57,-2293.43 ; v2(1306,-2146) 1290,-2162 1250.56,-2162 1225.44,-2187.12 1225.44,-2290.56 1222.57,-2293.43 ; v2(1322,-1858) v2(1562,-1858) ; v2(1602,-1034) 1614,-1022 2657.18,-1022 2721.23,-957.95 U10.15@2752.48,-957.95
  Bottom Layer w10: v2(1306,-2146) 1306,-1874 v2(1322,-1858) ; v2(1562,-1858) 1569,-1858 1586,-1841 1586,-1050 v2(1602,-1034)
PUMP2: R6.1@1000,-1985.43 R7.1@1080,-1985.43 U10.16 | length 2679.6
  Top Layer w10: R6.1@1000,-1985.43 R7.1@1080,-1985.43 1114.57,-1985.43 v2(1122,-1978) ; v2(1130,-1882) 1133.5,-1878.5 v2(1579.49,-1878.5) ; v2(1626,-1050) 1636,-1040 2664.64,-1040 2727,-977.64 U10.16@2752.48,-977.64
  Bottom Layer w10: v2(1122,-1978) 1130,-1970 v2(1130,-1882) ; v2(1579.49,-1878.5) 1579.49,-1872.96 1606,-1846.46 1606,-1070 v2(1626,-1050)
S\T\D\B\Y\: R2.2@5346.1,-2312.32 U4.27 | length 105.8
  Top Layer w10: U4.27@5331.65,-2412.13 5331.65,-2361.19 5346.1,-2346.73 R2.2@5346.1,-2312.32
SGND: C10.2@2322,-158.57 C11.2@2482,-143.32 C13.2@3250,-294.57 C14.2@3100,-237.32 C20.1 C32.2 C33.2 C37.2 C38.2 C39.1 C43.2 C44.2 P12.4 P13.4 Q2.2@1165.71,-1987.4 Q4.2 Q7.2 Q9.2 R3.2@2501.43,-1122 R28.2 R37.1 R43.1 R48.1 R48.2 R48.3 R48.4 R48.7 R54.1 S1.9 S1.10 S1.11 S1.12 S1.13 S1.14 S1.15 S1.16 S2.1 U4.1@1985.83,-109.45 U5.9@4015.92,-809.18 U7.1@3135,-1315 U8.5 U8.10 U8.12 U10.12 U10.18 U10.31 U10.47 U10.63 U13.2 U14.2 U15.2 U16.3 | length 5887.7
  Top Layer w10: Q4.2@652.6,-2215.71 688.31,-2180 928,-2180 938,-2170 v1(994,-2170) ; v1(1012.29,-2215.71) Q9.2@1032.6,-2215.71 1082,-2166.31 v1(1082,-2146) ; v1(1130,-2023.11) Q2.2@1165.71,-1987.4 1203.4,-1987.4 v1(1210,-1994) ; v1(1282,-2018) 2050,-2018 v1(2154,-1914) 2314,-1914 2360,-1960 U14.2@2630,-1960 ; U16.3@1906.3,-2570 1906.3,-2537.7 v1(1938,-2506) ; v1(1962,-2370) 2250,-2370 U15.2@2300,-2320 2300,-2295 v1(2295,-2290) ; v1(2309,-2245) 2311,-2247 2375,-2247 2397,-2225 2560,-2225 ; v1(2500,-1090) 2500,-1089.44 2501.43,-1089.44 R3.2@2501.43,-1122 ; v1(2560,-2215) 2560,-2225 ; v1(2560,-2040) 2560,-2030 U14.2@2630,-1960 ; v1(2720,-1930) 2690,-1960 U14.2@2630,-1960 ; v1(2734.06,-365.94) U8.5@2734.06,-308.43 ; v1(2745,-1705) R48.7@2867.8,-1705 R48.2@3092.2,-1705 ; U10.12@2752.48,-898.9 2780.19,-898.9 2781.01,-898.08 2791.92,-898.08 2835,-855 2835,-795 v1(2810,-770) ; v1(2760,-1105) 2824.19,-1105 2842.05,-1087.14 U10.18@2842.05,-1047.52 ; Q7.2@2784.29,-2332.6 2752.6,-2332.6 2645,-2225 2560,-2225 ; U10.63@2842.05,-612.48 2842.05,-649.44 2856.18,-663.57 v1(2860.43,-663.57) ; U8.10@2860.05,-288.74 2859.27,-287.96 2826.86,-287.96 2817.52,-278.62 2817.52,-257.48 2825.63,-249.37 U8.12@2860.05,-249.37 R37.1@2935.2,-249.37 ; v1(3074,-1098) 3082,-1098 3097.95,-1082.05 U10.31@3097.95,-1047.52 ; R48.1@3092.2,-1755 R48.2@3092.2,-1705 ; R48.4@3092.2,-1605 R48.3@3092.2,-1655 R48.2@3092.2,-1705 ; v1(3138.64,-730) 3138.64,-719.68 3156.27,-702.05 U10.47@3187.52,-702.05
  Top Layer w20: C14.2@3100,-237.32 v6(3177.68,-237.32)
  Bottom Layer w10: v1(994,-2170) 994,-2178 1012.29,-2196.29 v1(1012.29,-2215.71) ; v1(1082,-2146) 1088,-2146 1130,-2104 v1(1130,-2023.11) ; v1(1210,-1994) 1258,-1994 v1(1282,-2018) ; v1(1938,-2506) 1938,-2394 v1(1962,-2370) ; v1(2295,-2290) 2295,-2259 v1(2309,-2245) ; v1(2500,-1090) v1(2500,-805) ; v1(2560,-2215) v1(2560,-2040) ; v1(2720,-1930) 2720,-1730 v1(2745,-1705) ; C37.2@2730,-1135.43 2760,-1105.43 v1(2760,-1105) v1@2760.43,-1105 ; v1(3074,-1098) 3076.05,-1095.95 v1@3079.94,-1095.95 ; v1(3154,-594) 3154,-580.57 C44.2@3210,-524.57
  other v6: 3685,-395 2250,-325
SR_D0: R20.2 U10.35 | length 1865.9
  Top Layer w10: U10.35@3187.52,-938.27 3188.75,-939.5 3280.49,-939.5 3310.99,-970 v2(3314,-970) ; v2(3434,-2402) R20.2@3678.57,-2402
  Bottom Layer w10: v2(3314,-970) 3326,-982 3326,-2023.55 3430,-2127.55 3430,-2398 v2(3434,-2402)
SR_D1: R21.2 U10.36 | length 1798.7
  Top Layer w10: U10.36@3187.52,-918.58 3294.58,-918.58 v2(3346,-970) ; v2(3458,-2322) R21.2@3678.57,-2322
  Bottom Layer w10: v2(3346,-970) 3346,-2018.1 3450,-2122.1 3450,-2314 v2(3458,-2322)
SR_D2: R23.2 U10.37 | length 1717.5
  Top Layer w10: U10.37@3187.52,-898.9 3306.9,-898.9 v2(3378,-970) ; v2(3474,-2210) 3506,-2242 R23.2@3678.57,-2242
  Bottom Layer w10: v2(3378,-970) 3378,-1874 3468,-1964 3468,-2204 v2(3474,-2210)
SR_LED: R62.2 U10.33 | length 1818.6
  Top Layer w10: U10.33@3187.52,-977.64 3249.64,-977.64 v2(3250,-978) ; v2(3325,-2490) 3526.57,-2490 R62.2@3534.57,-2482
  Bottom Layer w10: v2(3250,-978) 3290,-1018 3290,-2455 v2(3325,-2490)
SR_SW: R18.2 U10.34 | length 1896.2
  Top Layer w10: U10.34@3187.52,-957.95 3187.52,-957.5 3269.5,-957.5 v2(3290,-978) ; v2(3418,-2426) 3433.44,-2441.44 3638.01,-2441.44 R18.2@3678.57,-2482
  Bottom Layer w10: v2(3290,-978) 3308,-996 3308,-2031.01 3412,-2135.01 3412,-2420 v2(3418,-2426)
SW1: S1.1@3837.87,-970 U10.51 | length 1176.7
  Top Layer w10: U10.51@3078.27,-612.48 3078.27,-580.52 3114.79,-544 3258.08,-544 3333.79,-619.71 3818,-619.71 3834,-635.71 3834,-966.13 S1.1@3837.87,-970
SW2: S1.2@3837.87,-1020 U10.52 | length 1369.7
  Top Layer w10: U10.52@3058.58,-612.48 3058.58,-574.75 3107.34,-526 3265.54,-526 3341.25,-601.71 3861.71,-601.71 3894,-634 3894,-1002 3876,-1020 S1.2@3837.87,-1020
SW3: S1.3 U10.53 | length 1517.4
  Top Layer w10: U10.53@3038.9,-612.48 3038.9,-568.98 3099.88,-508 3300.82,-508 3333.79,-540.97 3867.51,-540.97 3912,-585.46 3912,-1044 3886,-1070 S1.3@3837.87,-1070
SW4: S1.4 U10.54 | length 1652.8
  Top Layer w10: U10.54@3019.21,-612.48 3019.21,-563.21 3092.43,-490 3308.28,-490 3341.25,-522.97 3874.97,-522.97 3930,-578 3930,-1106 3916,-1120 S1.4@3837.87,-1120
SW5: S1.5 U10.45 | length 982
  Top Layer w10: U10.45@3187.52,-741.42 3301.52,-741.42 3341.25,-701.69 3516.69,-701.69 3762,-947 3762,-1154 3778,-1170 S1.5@3837.87,-1170
SW6: S1.6 U10.44 | length 986.3
  Top Layer w10: U10.44@3187.52,-761.1 3546.1,-761.1 3730,-945 3730,-1194 3756,-1220 S1.6@3837.87,-1220
SW7: S1.7 U10.40 | length 994.9
  Top Layer w10: U10.40@3187.52,-839.84 3220.16,-839.84 3240,-820 3284,-820 v2(3434,-970) ; v2(3434,-1226) 3442,-1234 3738,-1234 3774,-1270 S1.7@3837.87,-1270
  Bottom Layer w10: v2(3434,-1226) v2(3434,-970)
SW8: S1.8 U10.39 | length 1083.1
  Top Layer w10: U10.39@3187.52,-859.53 3225.93,-859.53 3244.73,-840.73 3277.72,-840.73 3406.99,-970 v2(3402,-970) ; v2(3402,-1282) 3402,-1314 3426,-1338 3746,-1338 3764,-1320 S1.8@3837.87,-1320
  Bottom Layer w10: v2(3402,-1282) v2(3402,-970)
SWCLK: P4.3 R55.2 U4.37 U10.49 | length 1040.2
  Top Layer w10: U10.49@3117.64,-612.48 3117.64,-615 3289.96,-615 v1(3292.48,-612.48) ; v1(3520,-890) 3550,-920 R55.2@3554.57,-920 ; v1(5064.83,-2208) 5064.83,-2422.88 U4.37@5104.28,-2462.33
  Bottom Layer w10: v1(3292.48,-612.48) 3330,-650 3460,-650 3510,-700 3510,-880 v1(3520,-890) ; v1(5064.83,-2208) P4.3@5132.83,-2140
SWDIO: P4.2@5232.83,-2140 R47.2 U4.34 U10.46 | length 926.5
  Top Layer w10: U10.46@3187.52,-721.73 3295.75,-721.73 3333.79,-683.69 3446.31,-683.69 v1(3450,-680) ; v1(3500,-940) 3550,-990 R47.2@3554.57,-990 ; v1(5190.83,-2363) 5193.85,-2366.02 U4.34@5193.85,-2412.13 ; v1(5226.83,-2300) 5226.83,-2146 P4.2@5232.83,-2140
  Bottom Layer w10: v1(3450,-680) 3490,-720 3490,-930 v1(3500,-940) ; v1(5190.83,-2363) 5191.61,-2362.23 5191.61,-2335.23 v1(5226.83,-2300)
TEM: R25.1 U7.2@3135,-1365 U10.27 | length 527.4
  Top Layer w10: U10.27@3019.21,-1047.52 3019.21,-1131.21 v2(3026,-1138) ; v2(3034,-1354) 3042,-1362 3106,-1362 R25.1@3245.43,-1362
  Bottom Layer w10: v2(3026,-1138) 3034,-1146 v2(3034,-1354)
VB+: BT1.1 C2.1@5724.83,-1979.32 C7.1@5948.7,-2653.62 Q1.2@4540.24,-2469.21 Q2.3@4502.83,-2517.68 R1.1@5984.27,-2294 R5.2@4612.83,-2524.57 R9.1@5502.84,-2504.57 U1.5@5385.74,-1852.2 U3.2@5866.02,-2836.69 U3.2@5866.02,-2935.12 U6.2@5651.02,-2838.13 U6.2@5651.02,-2936.55 | length 3983.3
  Top Layer w10: R9.1@5502.84,-2504.57 5547.83,-2459.57 v1(5547.83,-2402)
  Top Layer w20: U1.5@5385.74,-1852.2 5513.94,-1724 v3(5562.83,-1724) ; C2.1@5724.83,-1979.32 5727.83,-1976.32 v3(5727.83,-1853)
  Top Layer w25: Q2.3@4502.83,-2517.68 4502.83,-2506.61 Q1.2@4540.24,-2469.21 ; Q2.3@4504.16,-2519 4528.7,-2519 4534.27,-2524.57 R5.2@4612.83,-2524.57 v8(4672.27,-2524.57) ; U6.2@5651.02,-2936.55 U6.2@5651.02,-2838.13 5652.46,-2836.69 U3.2@5866.02,-2836.69 ; C2.1@5724.83,-1979.32 5875.04,-2129.53 BT1.1@5981.46,-2129.53 ; U3.2@5866.02,-2935.12 U3.2@5866.02,-2836.69 ; BT1.1@5984.27,-2132.33 R1.1@5984.27,-2294 5984.44,-2294 6039.83,-2349.39 6039.83,-2453 5948.7,-2544.13 C7.1@5948.7,-2653.62 5866.02,-2736.3 U3.2@5866.02,-2836.69
  Bottom Layer w10: v1(5547.83,-2402) 5547.83,-2361.94
  Bottom Layer w20: v3(5562.83,-1724) 5612.29,-1724 5630.83,-1742.54 5630.83,-1749.92 5727.83,-1846.92 v3(5727.83,-1853)
  Bottom Layer w25: v8(4672.27,-2524.57) 5232.66,-2524.57 5395.29,-2361.94 5547.83,-2361.94 5749.05,-2361.94 BT1.1@5981.46,-2129.53
WIFI_RX: U4.30 U5.15 U10.29 | length 3840.9
  Top Layer w10: U10.29@3058.58,-1047.52 v2(3058.58,-1002.58) ; v2(3199.77,-444.23) 3847.77,-444.23 3953.26,-338.74 U5.15@4019.92,-338.74 ; U5.15@4651.58,-440.08 5074.02,-862.53 5074.02,-1127.19 5100.83,-1154 5122.06,-1154 5224.95,-1256.9 5224.95,-1392.13 5160.83,-1456.25 v1(5160.83,-2078) ; v1(5184.83,-2282) 5205.83,-2303 5205.83,-2316.62 5238.16,-2348.95 5249.02,-2348.95 5272.59,-2372.51 U4.30@5272.59,-2412.13
  Bottom Layer w10: v2(3058.58,-1002.58) 3058.58,-561.42 3175.77,-444.23 v2(3199.77,-444.23) ; v1(5160.83,-2078) 5184.83,-2102 v1(5184.83,-2282)
WIFI_TX: U4.31 U5.16 U10.30 | length 4009.2
  Top Layer w10: U10.30@3078.27,-1047.52 3079.08,-1046.7 3079.08,-1004.92 v2(3090,-994) ; v2(3186,-466) 3210,-466 3213.77,-462.23 3855.23,-462.23 3939.46,-378 4058.1,-378 4074,-362.1 4074,-266 4068,-260 U5.16@4019.92,-260 ; U5.16@4572.83,-440.08 5004.83,-872.08 5004.83,-1130 5130.83,-1256 5130.83,-1433 5085.83,-1478 5085.83,-2213 v1(5139.83,-2267) ; v1(5181.83,-2309) 5181.83,-2324 5226.46,-2368.62 5240.64,-2368.62 5252.91,-2380.88 U4.31@5252.91,-2412.13
  Bottom Layer w10: v2(3090,-994) 3090,-562 v2(3186,-466) ; v1(5139.83,-2267) v1(5181.83,-2309)
pads on no net: P7.6 P8.1 P8.5 P8.9 U1.3@3210.55,-3079.45 U1.4@3469.45,-3079.45 U1.9 U2.7 U2.8 U3.6 U4.1@5154.48,-2729.06 U4.2 U4.3@5193.85,-2729.06 U4.4@5213.54,-2729.06 U4.11 U4.14 U4.15 U4.16 U4.18 U4.19 U4.25 U4.26 U4.29 U4.32 U4.33 U4.38 U4.39 U4.40 U4.41 U4.42 U4.43 U4.45 U5.2 U5.4 U5.5 U5.6 U5.7 U5.11 U5.12 U5.13 U5.14 U7.0 U7.3@5482.43,-1374.51 U7.4 U7.5 U7.7 U7.8 U7.9 U7.10 U7.11 U7.12 U7.13 U7.14 U7.15 U7.16 U7.17 U7.18 U7.19 U7.20 U7.21 U7.22 U7.23 U7.24 U7.25 U7.26 U8.3 U8.8 U8.9 U8.11 U8.13 U8.15 U8.16 U10.1 U10.2 U10.3 U10.4
copper on no net: | length 165.5
  Top Layer w20: v6(3630,-760) v6(3715,-675)
  Bottom Layer w10: 1594,-1892.98 1626,-1860.98
  other v1: 4467.83,-2070 4497.83,-2070 4527.83,-2070 4557.83,-2070
  other v7: 5471.37,-1970.5 5514.68,-1970.5 5471.37,-1927.2 5514.68,-1927.2 5471.37,-1883.89 5514.68,-1883.89

## Polygon pours and split planes (outlines as drawn)
SGND on Bottom Layer "BSGND" (solid, remove dead copper, pour order 5): 1900,-100 1900,-400 2350,-400 2350,-1150 2750,-1150 2750,-1850 4150,-1850 4150,-100
PGND on Bottom Layer "BPGND" (solid, remove dead copper, pour order 7): 1850,-100 750,-100 750,-900 550,-900 550,-2800 1550,-2800 1550,-3150 3950,-3150 4150,-3150 4150,-1900 2700,-1900 2700,-1200 2300,-1200 2300,-450 1850,-450
GND on Bottom Layer "BGND" (solid, remove dead copper, pour order 3): 6112.83,-3400 6062.83,-3450 4362.83,-3450 4312.83,-3400 4312.83,150 4362.83,200 6062.83,200 6112.83,150
SGND on Top Layer "TSGND" (solid, remove dead copper, pour order 6): 1900,-100 1900,-400 2350,-400 2350,-1150 2750,-1150 2750,-1850 4150,-1850 4150,-100
PGND on Top Layer "TPGND" (solid, remove dead copper, pour order 8): 1850,-100 750,-100 750,-900 550,-900 550,-2800 1550,-2800 1550,-3150 3950,-3150 4150,-3150 4150,-1900 2700,-1900 2700,-1200 2300,-1200 2300,-450 1850,-450
GND on Top Layer "TGND" (solid, remove dead copper, pour order 4): 6112.83,-3400 6062.83,-3450 4362.83,-3450 4312.83,-3400 4312.83,150 4362.83,200 6062.83,200 6112.83,150

## Keep-outs
Keep-Out Layer:
  lines w6: 0,-3350 0,0 4250,0 4250,-3350 0,-3350
  lines w10: 4250,-3350 ccw(c4398.66,-3350) 4398.66,-3498.66 6012.83,-3498.66 ccw(c6012.83,-3350) 6161.5,-3350 6161.5,114.57 ccw(c6012.83,114.57) 6012.83,263.23 4398.66,263.23 ccw(c4398.66,114.57) 4250,114.57 4250,-3350

## Other copper
Top Layer:
  region: 4577.84,-2090 4577.84,-2050 4457.84,-2050 4457.84,-2090
Bottom Layer:
  region: 4452.84,-2135 4452.84,-2005 4387.84,-2005 4387.84,-2135
  region: 4582.84,-2095 4582.84,-2045 4452.84,-2045 4452.84,-2095
  region: 5612.84,-2080 5612.84,-2025.63 5352.84,-2025.63 5352.84,-2080
  region: 5612.84,-1820.9 5612.84,-1750 5352.84,-1750 5352.84,-1820.9

## Silkscreen, mask and mechanical layers (free items; w line width, h text height)
Top Overlay:
  lines w6: 554,-1770 554,-1546 ; 564,-1032 672,-1032 690,-1050 690,-1170 ; 2652,-1830.01 2652,-1920 2654,-1922 2722,-1922 2722,-2034 ; 2746,-2474 2902,-2474 2828,-2400 3010.98,-2400
  text "RX" at 3410,-1210 h30
  text "TX" at 3410,-1310 h30
  text "3.3V" at 3740,-1440 h30
  text "V0.2" at 4782.83,-2960 h100 r90
Bottom Overlay:
  lines w7.87: 4359.29,-3192.52 4359.29,-1814.57 6130.94,-1814.57 6130.94,-3192.52 4359.29,-3192.52
  text "+" at 5206.28,-1961.15 h100 r90
  text "-" at 5406.28,-2089.15 h100 r90
  text "Battery" at 5697.87,-2405.12 h275.59 r180
  text "ArtFire" at 4170,-3140 h200
  text "V0.7" at 4170,-3300 h200

## Text inside footprints (layer, text, board x,y; h text height)
P8: Top Overlay "ANT" at 3840,-3590 h196.85 r270
S1: Top Overlay "8" at 3800.47,-1355.83 h39.37 r270; Top Overlay "1" at 3800.47,-920 h39.37 r270; Top Overlay "ON" at 4091.81,-899.13 h39.37 r270